# EAGLE board untitled1 (EAGLE 9.6.0)
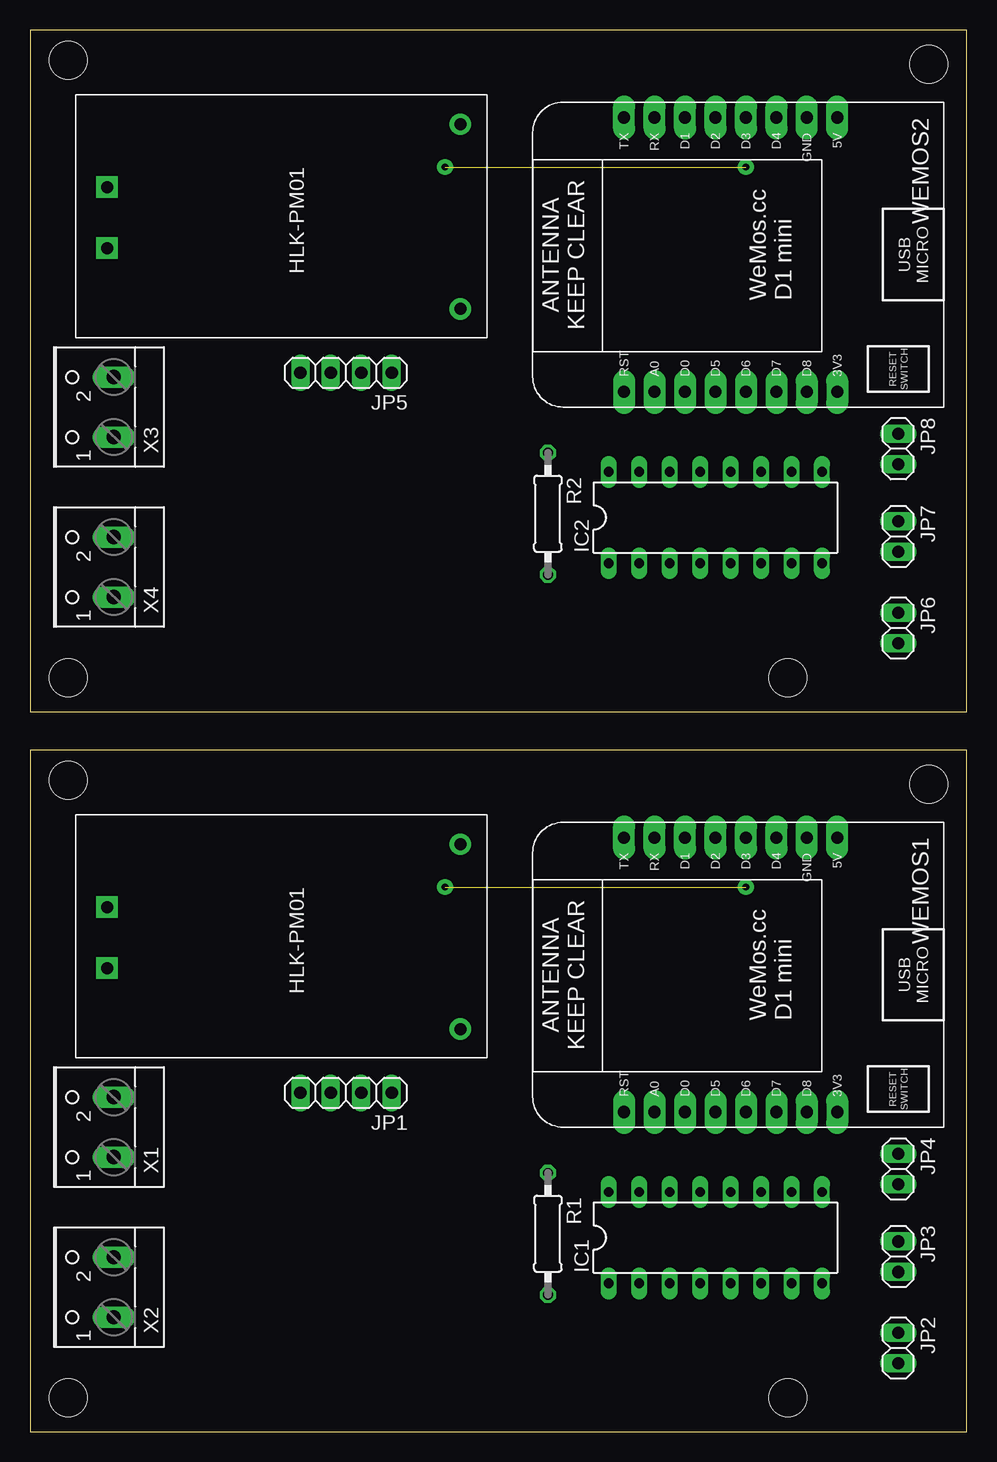
[diagram p0: board, top side]
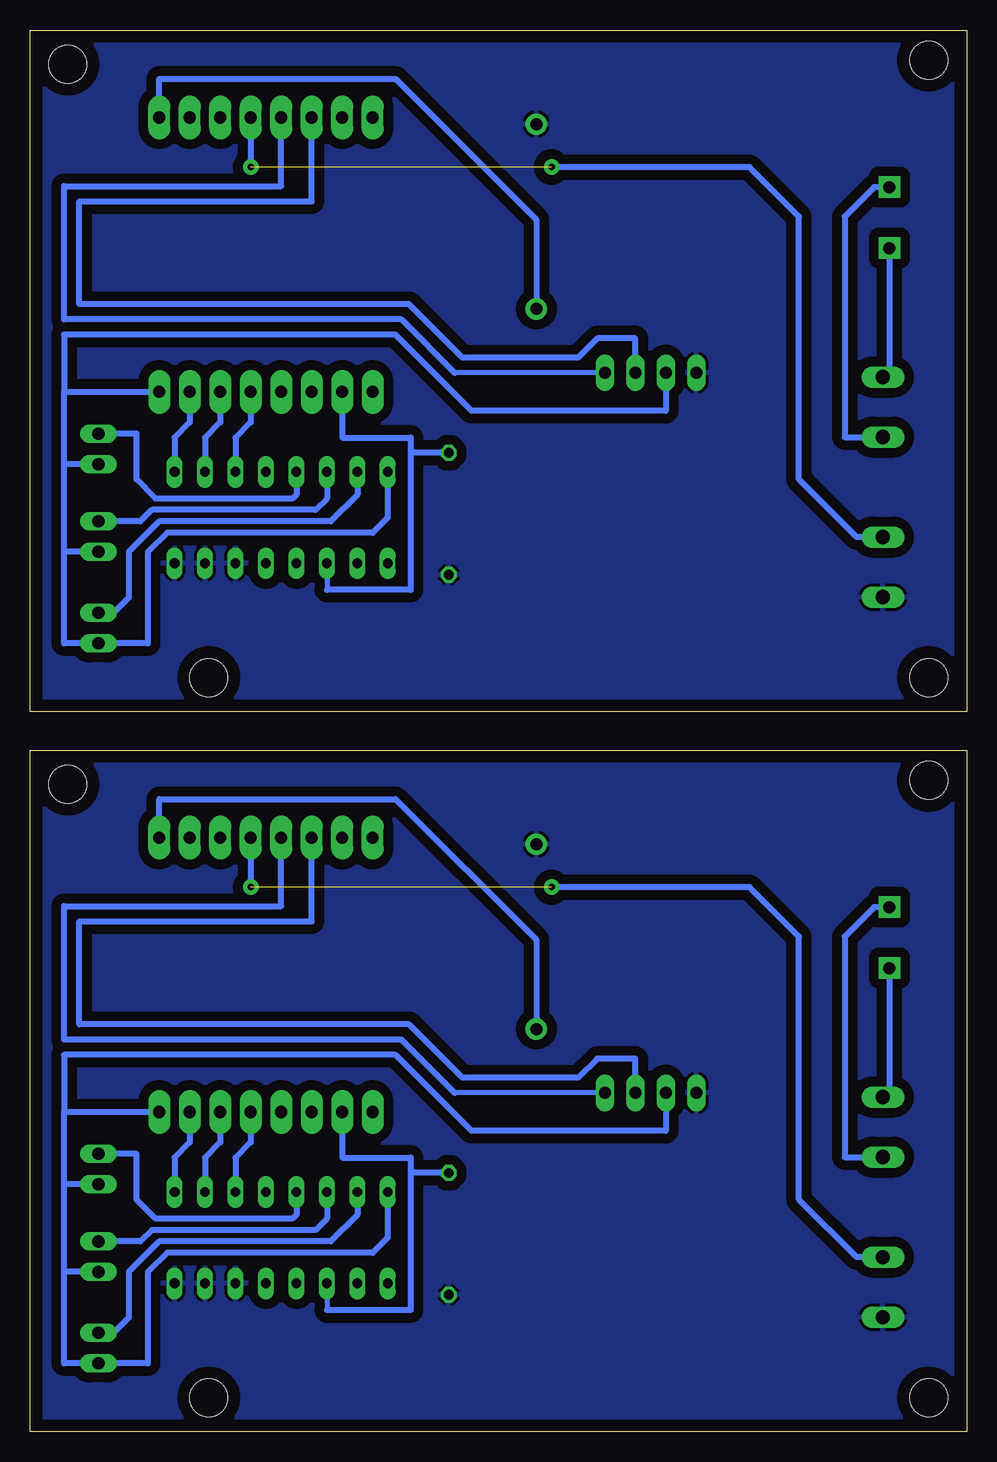
[diagram p1: board, bottom side, seen from below]

Size 78.09 x 116.83 mm. Coordinates in mm from the lower left corner, seen from the top.
Outline: 0,0 78.09,0 78.09,56.82 0,56.82 0,0
Outline: 0,60.01 78.09,60.01 78.09,116.83 0,116.83 0,60.01
Copper layers (1*16): Top 0.035mm / dielectric 1.5mm / Bottom 0.035mm
Design rules "default": minimum track width 6mil, minimum drill 0.35mm, track to track 6mil, track to pad 6mil, pad to pad 6mil, via to via 6mil, smd to smd 6mil, copper to edge 40mil, drill to drill 6mil, minimum pad ring 10mil, minimum via ring 8mil, stop-mask expansion 4mil, vias tented up to drill 0mil, thermal gap 10mil
Net classes: 0 default: width 0.406 mm, drill 0.406 mm, clearance 0.406 mm
Holes 3.15 mm at 3.17,54.29 3.17,2.86 74.93,53.98 63.18,2.86 3.17,114.3 3.17,62.87 74.93,113.98 63.18,62.87

## Footprints (pad centres in the part's own frame; a part is rotated, then mirrored left to right if it is on the bottom)
DIL16 = drill 0.813 long: 1 -8.89,-3.81; 2 -6.35,-3.81; 3 -3.81,-3.81; 4 -1.27,-3.81; 5 1.27,-3.81; 6 3.81,-3.81; 7 6.35,-3.81; 8 8.89,-3.81; 9 8.89,3.81; 10 6.35,3.81; 11 3.81,3.81; 12 1.27,3.81; 13 -1.27,3.81; 14 -3.81,3.81; 15 -6.35,3.81; 16 -8.89,3.81
1X04 = drill 1.016 long: 1 -3.81,0; 2 -1.27,0; 3 1.27,0; 4 3.81,0
1X02 = drill 1.016 long: 1 -1.27,0; 2 1.27,0
0207/10 = drill 0.813 octagon: 1 -5.08,0; 2 5.08,0
HLK-PM01 = drill 1 pad 1.778 square: P$1 7.699,2.619; P$2 12.779,2.619 | drill 1 pad 1.778: P$3 2.461,32.068; P$4 17.859,32.068
WEMOS-D1-MINI = drill 1.016 pad 1.829 long: 3V3 -10.16,-10.16; 5V 12.7,-10.16; A0 -10.16,5.08; D0 -10.16,2.54; D1 12.7,2.54; D2 12.7,0; D3 12.7,-2.54; D4 12.7,-5.08; D5 -10.16,0; D6 -10.16,-2.54; D7 -10.16,-5.08; D8 -10.16,-7.62; GND 12.7,-7.62; RESET -10.16,7.62; RX 12.7,5.08; TX 12.7,7.62
W237-102 = drill 1.194 long: 1 -2.5,-1.27; 2 2.5,-1.27

## Placement (x,y rotation side)
IC1  4051N  [DIL16]  57.15,16.19 0 top
IC2  4051N  [DIL16]  57.15,76.2 0 top
JP1  [1X04]  26.35,28.26 180 top
JP2  [1X02]  72.39,6.99 270 top
JP3  [1X02]  72.39,14.61 270 top
JP4  [1X02]  72.39,21.91 270 top
JP5  [1X04]  26.35,88.27 180 top
JP6  [1X02]  72.39,66.99 270 top
JP7  [1X02]  72.39,74.61 270 top
JP8  [1X02]  72.39,81.92 270 top
R1  [0207/10]  43.18,16.51 270 top
R2  [0207/10]  43.18,76.52 270 top
U$1  HLK-PM01  [HLK-PM01]  3.81,111.44 270 top
U$6  HLK-PM01  [HLK-PM01]  3.81,51.44 270 top
WEMOS1  [WEMOS-D1-MINI]  57.15,36.83 90 top
WEMOS2  [WEMOS-D1-MINI]  57.15,96.84 90 top
X1  [W237-102]  5.71,25.4 90 top
X2  [W237-102]  5.71,12.06 90 top
X3  [W237-102]  5.71,85.41 90 top
X4  [W237-102]  5.71,72.07 90 top

## Library data of the parts
IC1 IC2 = 40xx
JP1-JP8 = pinhead
R1 R2 = rcl; SPICEPREFIX: R
U$1 U$6 = diy-modules; HLK-PM01: HLK-PM01
WEMOS1 WEMOS2 = esp8266modules
X1-X4 = con-wago-500; MPN: 237-102; OC_FARNELL: unknown; OC_NEWARK: 70K9898

## Nets
3V1: IC2.16 JP5.3 JP6.2 JP7.2 JP8.2 WEMOS2.3V3
3V3: IC1.16 JP1.3 JP2.2 JP3.2 JP4.2 WEMOS1.3V3
5V: U$6.P$4 WEMOS1.5V
5V1: U$1.P$4 WEMOS2.5V
D1: IC2.9 WEMOS2.D8
D2: IC2.10 WEMOS2.D7
D3: IC2.11 WEMOS2.D6
D6: IC1.11 WEMOS1.D6
D7: IC1.10 WEMOS1.D7
D8: IC1.9 WEMOS1.D8
GND: IC1.6 IC1.7 IC1.8 JP1.4 R1.2 U$6.P$3 X2.1
GND1: IC2.6 IC2.7 IC2.8 JP5.4 R2.2 U$1.P$3 X4.1
N$1: IC1.3 R1.1 WEMOS1.A0
N$2: IC1.13 JP4.1
N$3: IC1.14 JP3.1
N$4: IC1.15 JP2.1
N$5: JP1.1 WEMOS1.D2
N$6: JP1.2 WEMOS1.D1
N$7: U$6.P$1 X1.1
N$8: U$6.P$2 X1.2
N$9: WEMOS1.D3 X2.2
N$10: IC2.3 R2.1 WEMOS2.A0
N$11: IC2.13 JP8.1
N$12: IC2.14 JP7.1
N$13: IC2.15 JP6.1
N$14: JP5.1 WEMOS2.D2
N$15: JP5.2 WEMOS2.D1
N$16: U$1.P$1 X3.1
N$17: U$1.P$2 X3.2
N$18: WEMOS2.D3 X4.2

## Tracks (layer width: path | path; a pad name or v marks a point on that pad's centre or on a via)
3V1
  Bottom 0.508: JP5.3 25.08,85.09 41.27,85.09 47.62,91.44 75.25,91.44 75.25,86.68 | 75.25,86.68 WEMOS2.3V3 | IC2.16 48.26,76.2 49.53,74.93 66.67,74.93 68.26,73.34 68.26,65.72 JP6.2 75.25,65.72 75.25,73.34 | 75.25,73.34 75.25,80.64 | 75.25,80.64 75.25,86.68 | JP8.2 75.25,80.64 | JP7.2 75.25,73.34
3V3
  Bottom 0.508: JP1.3 25.08,25.08 41.27,25.08 47.62,31.43 75.25,31.43 75.25,26.67 | 75.25,26.67 WEMOS1.3V3 | IC1.16 48.26,16.19 49.53,14.92 66.67,14.92 68.26,13.34 68.26,5.71 JP2.2 75.25,5.71 75.25,13.34 | 75.25,13.34 75.25,20.64 | 75.25,20.64 75.25,26.67 | JP4.2 75.25,20.64 | JP3.2 75.25,13.34
5V
  Bottom 0.508: WEMOS1.5V 67.31,52.75 47.62,52.75 35.88,41 U$6.P$4
5V1
  Bottom 0.508: WEMOS2.5V 67.31,112.75 47.62,112.75 35.88,101.01 U$1.P$4
D1
  Bottom 0.508: WEMOS2.D8 64.77,84.14 66.04,82.87 IC2.9
D2
  Bottom 0.508: WEMOS2.D7 62.23,84.14 63.5,82.87 IC2.10
D3
  Bottom 0.508: WEMOS2.D6 59.69,84.14 60.96,82.87 IC2.11
D6
  Bottom 0.508: WEMOS1.D6 59.69,24.13 60.96,22.86 IC1.11
D7
  Bottom 0.508: WEMOS1.D7 62.23,24.13 63.5,22.86 IC1.10
D8
  Bottom 0.508: WEMOS1.D8 64.77,24.13 66.04,22.86 IC1.9
GND
  pour Bottom (isolate 0.813): 0,56.83 78.11,56.83 78.11,0 0,0
GND1
  pour Bottom (isolate 0.813): 0,116.84 78.11,116.84 78.11,60.01 0,60.01
N$1
  Bottom 0.406: IC1.3 53.34,10.16
  Bottom 0.508: 53.34,10.16 46.35,10.16 46.35,21.59 | WEMOS1.A0 52.07,22.86 46.35,22.86 46.35,21.59 | R1.1 46.35,21.59
N$2
  Bottom 0.508: IC1.13 55.88,18.1 56.2,17.78 67.63,17.78 69.22,19.37 69.22,23.18 JP4.1
N$3
  Bottom 0.508: IC1.14 53.34,17.78 54.29,16.83 67.94,16.83 68.9,15.88 JP3.1
N$4
  Bottom 0.406: 71.12,8.26 JP2.1
  Bottom 0.508: IC1.15 50.8,18.1 53.02,15.88 67.31,15.88 69.85,13.34 69.85,9.53 71.12,8.26
N$5
  Bottom 0.406: JP1.1 42.69,28.26
  Bottom 0.508: 42.69,28.26 47.13,32.7 75.25,32.7 75.25,43.81 57.15,43.81 WEMOS1.D2
N$6
  Bottom 0.508: WEMOS1.D1 54.61,42.55 73.98,42.55 73.98,33.97 46.49,33.97 42.05,29.53 32.38,29.53 30.8,31.11 27.62,31.11 JP1.2
N$7
  Bottom 0.508: U$6.P$1 7.7,43.74 10.16,41.27 10.16,22.9 X1.1
N$8
  Bottom 0.508: U$6.P$2 6.43,28.46 X1.2
N$9  (via drill 0.55 pad 1.3)  (1 unrouted)
  Bottom 0.508: X2.2 9.17,14.56 13.97,19.37 13.97,41.27 18.1,45.4 v34.61,45.4 | WEMOS1.D3 v59.69,45.4
N$10
  Bottom 0.406: IC2.3 53.34,70.17
  Bottom 0.508: 53.34,70.17 46.35,70.17 46.35,81.6 | WEMOS2.A0 52.07,82.87 46.35,82.87 46.35,81.6 | R2.1 46.35,81.6
N$11
  Bottom 0.508: IC2.13 55.88,78.11 56.2,77.79 67.63,77.79 69.22,79.38 69.22,83.19 JP8.1
N$12
  Bottom 0.508: IC2.14 53.34,77.79 54.29,76.83 67.94,76.83 68.9,75.88 JP7.1
N$13
  Bottom 0.406: 71.12,68.26 JP6.1
  Bottom 0.508: IC2.15 50.8,78.11 53.02,75.88 67.31,75.88 69.85,73.34 69.85,69.53 71.12,68.26
N$14
  Bottom 0.406: JP5.1 42.69,88.27
  Bottom 0.508: 42.69,88.27 47.13,92.71 75.25,92.71 75.25,103.82 57.15,103.82 WEMOS2.D2
N$15
  Bottom 0.508: WEMOS2.D1 54.61,102.55 73.98,102.55 73.98,93.98 46.49,93.98 42.05,89.53 32.38,89.53 30.8,91.12 27.62,91.12 JP5.2
N$16
  Bottom 0.508: U$1.P$1 7.7,103.74 10.16,101.28 10.16,82.91 X3.1
N$17
  Bottom 0.508: U$1.P$2 6.43,88.46 X3.2
N$18  (via drill 0.55 pad 1.3)  (1 unrouted)
  Bottom 0.508: X4.2 9.17,74.57 13.97,79.38 13.97,101.28 18.1,105.41 v34.61,105.41 | WEMOS2.D3 v59.69,105.41